# Altium PCB HV PDU.PcbDoc
Units mm, origin at the board's own origin, x right, y up, seen from the top; angles counter-clockwise.
Board outline 100 x 100 mm, 2 copper layers (Top Layer, Bottom Layer), stack 1.544 mm thick; 29 components, 17 nets, 64 pads, 0 vias.
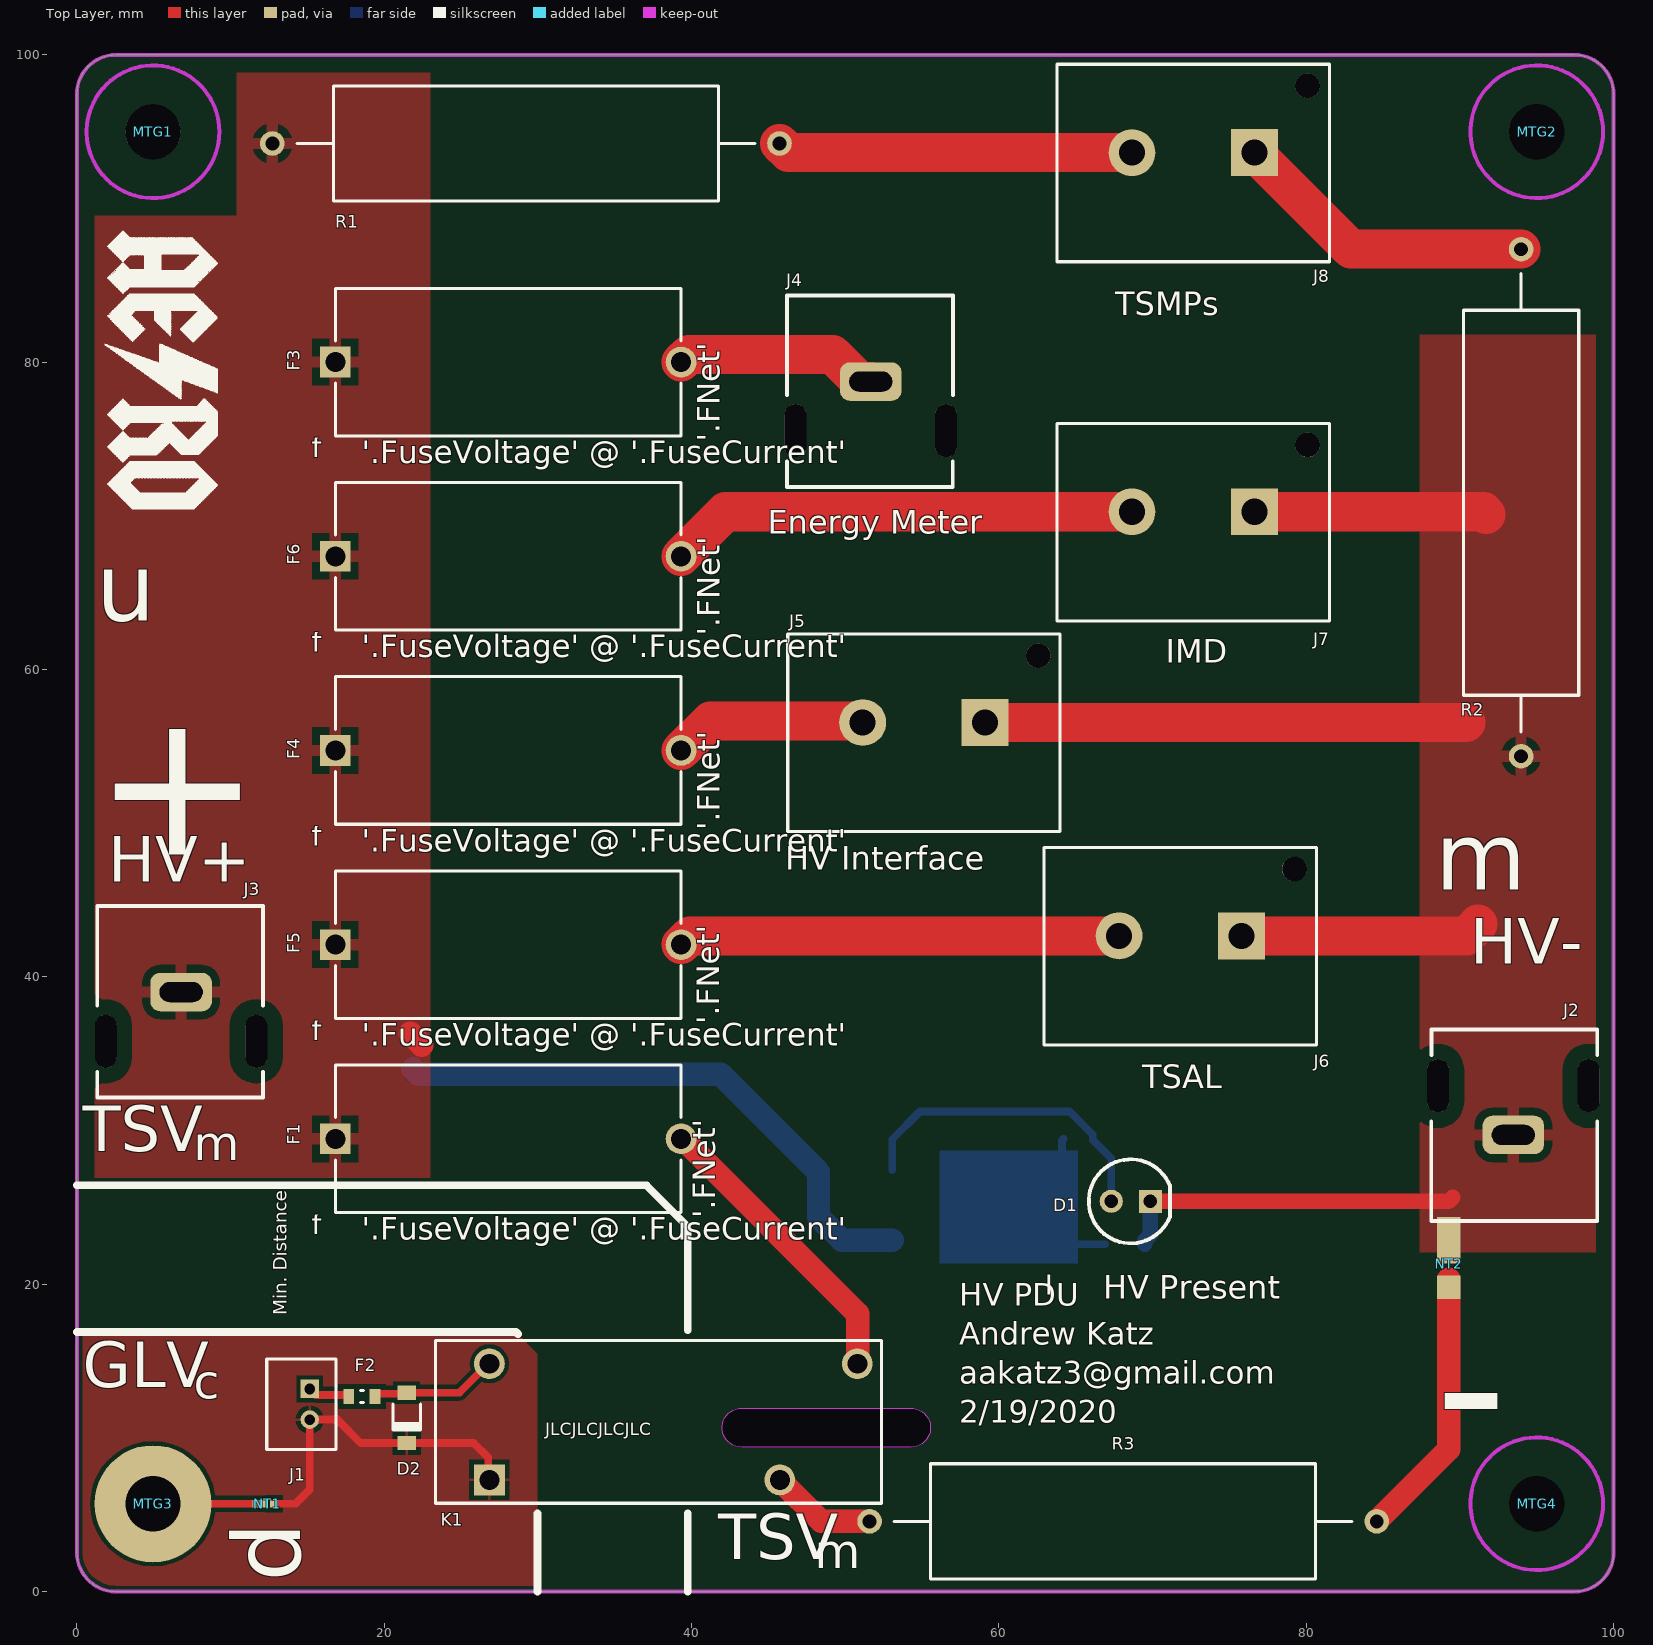
[diagram p0: Top Layer view]
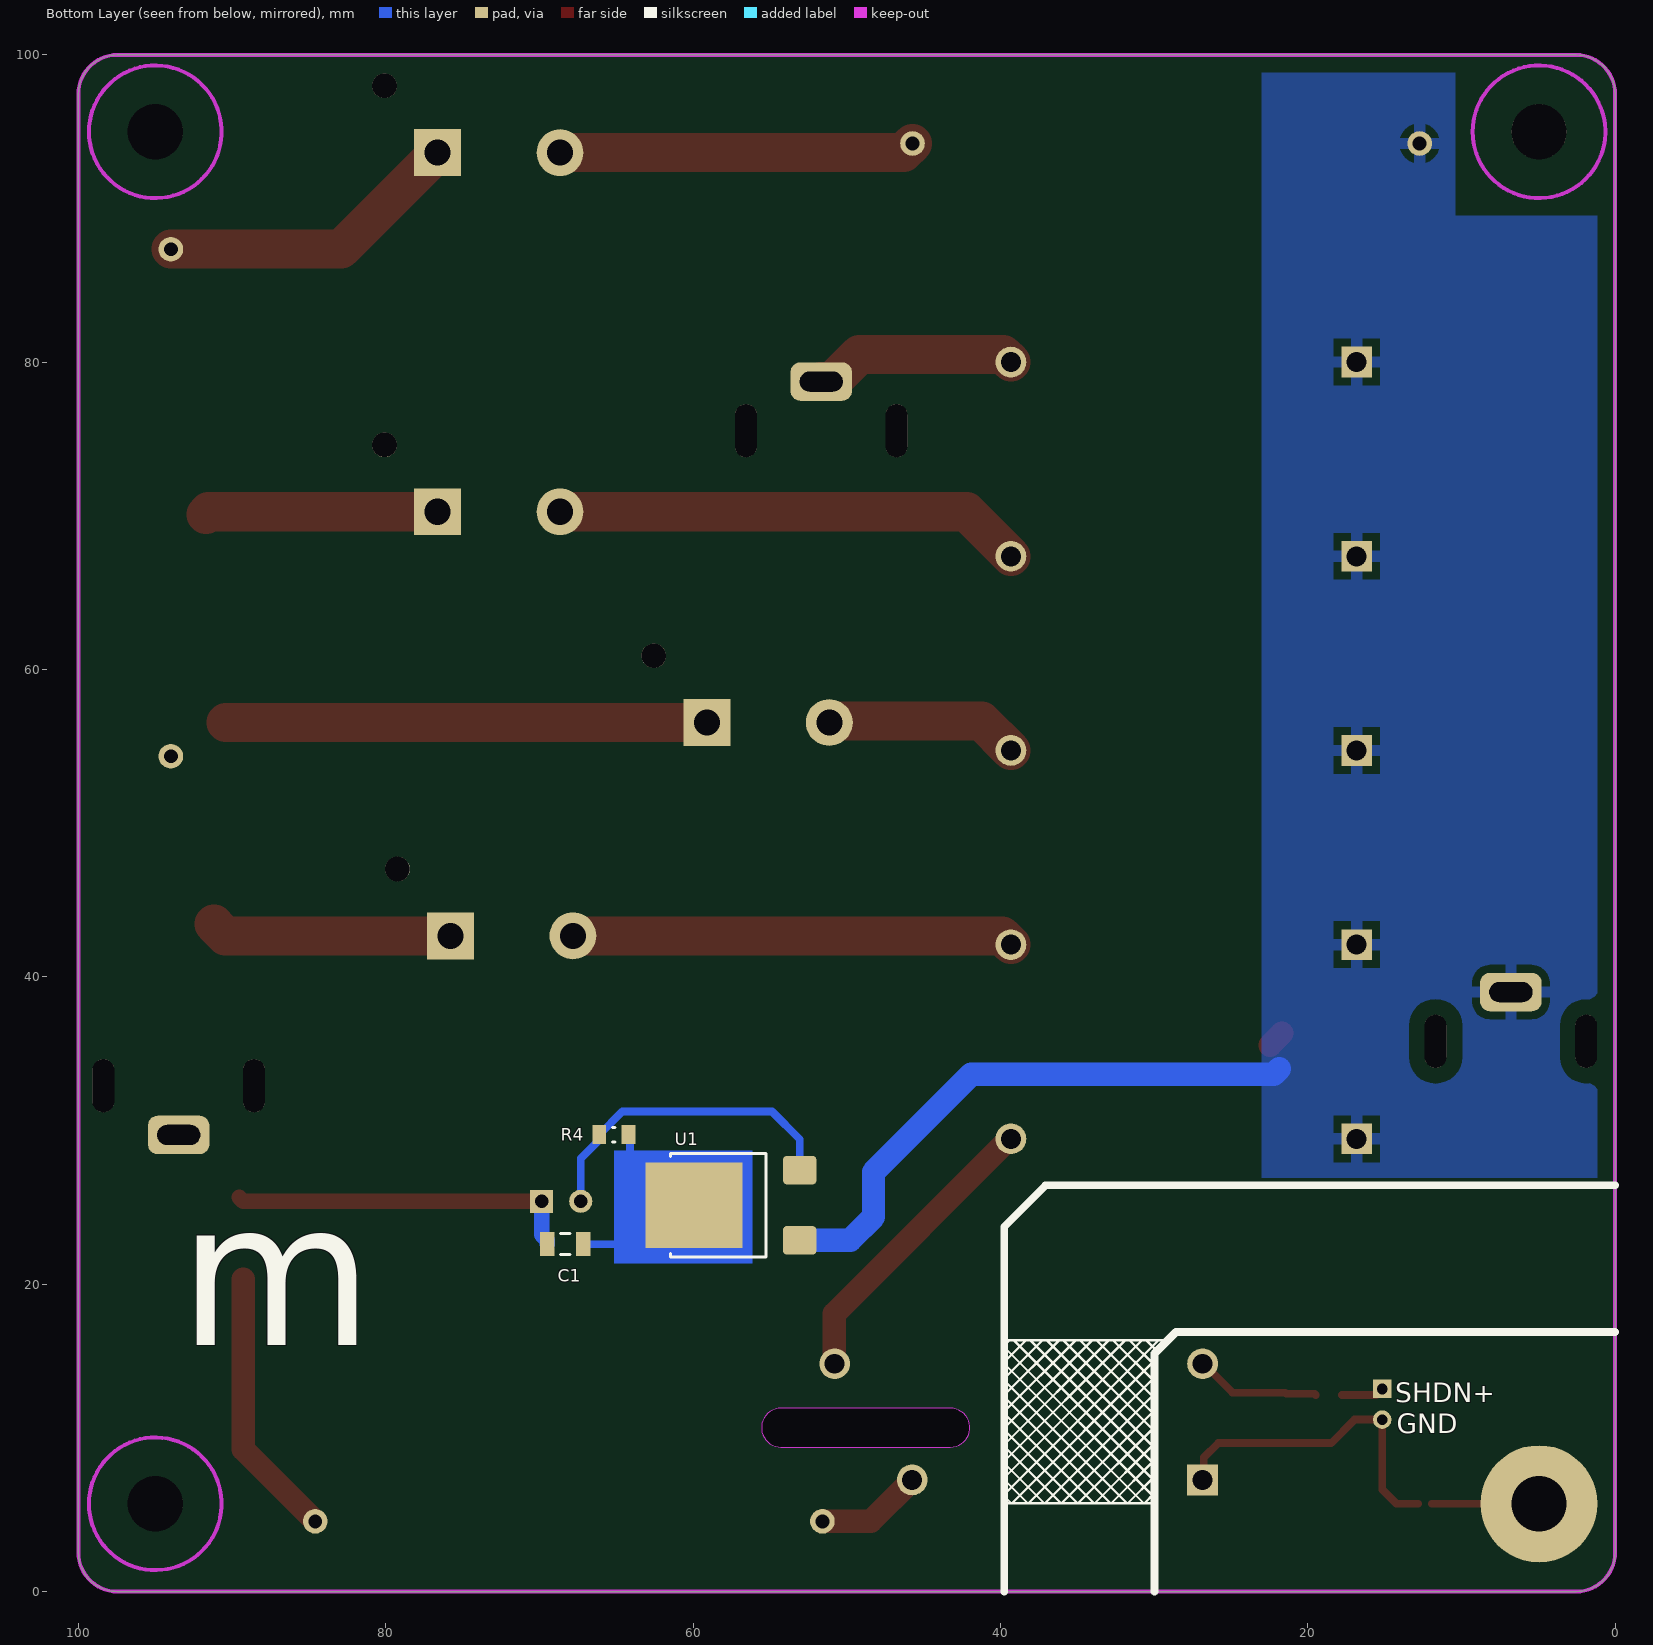
[diagram p1: Bottom Layer view, seen from below]
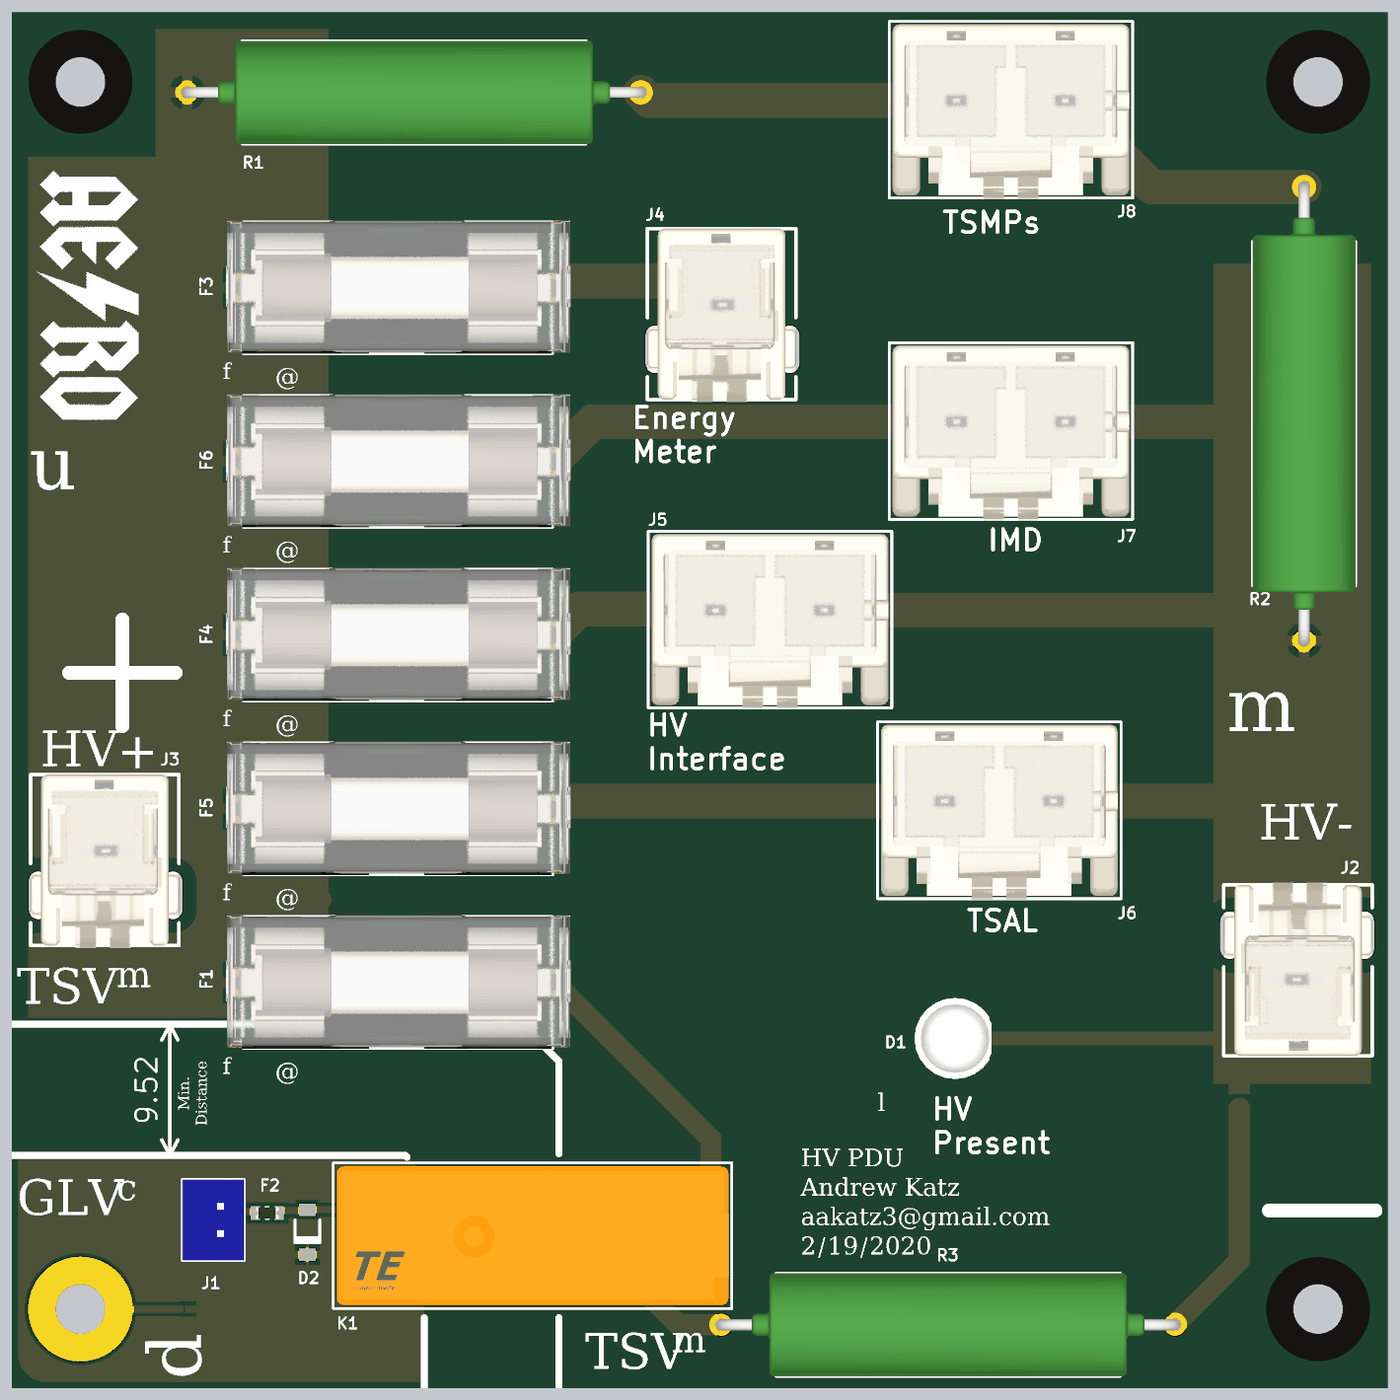
[diagram p2: 3D render of the assembled board from above, using the file's embedded part models]

## Layer stack, top to bottom
Top Solder: solder mask 0.0254, SM-001, Dk 4
Top Layer: signal copper 0.0356
Dielectric 1: core 1.4732, FR-4, Dk 4.2
Bottom Layer: signal copper 0.0356
Bottom Solder: solder mask 0.0254, SM-001, Dk 4

## Board outline
2.54,0 cw(c2.54,2.54) 0,2.54 0,97.46 cw(c2.54,97.46) 2.54,100 97.46,100 cw(c97.46,97.46) 100,97.46 100,2.54 cw(c97.46,2.54) 97.46,0
cut-out: 43.256,9.398 cw(c43.256,10.668) 43.256,11.938 54.28,11.938 cw(c54.28,10.668) 54.28,9.398

## Design rules (kind name [scope] priority, off if disabled: settings)
Clearance TsGlvClr [InNetClass('TS') vs InNetClass('GLV')] p1: gap=10 ignorepadtopadclearanceinfootprint=TRUE except(0: Arc-Hole Track-Hole SMDPad-Hole THPad-Hole Via-Hole Fill-Hole Poly-Hole Region-Hole Text-Hole; 500: Poly-Region)
Clearance MTG [InNetClass('MTG') vs InNetClass('TS')] p2: gap=10 ignorepadtopadclearanceinfootprint=TRUE except(0: Arc-Hole Track-Hole SMDPad-Hole THPad-Hole Via-Hole Fill-Hole Poly-Hole Region-Hole Text-Hole; 4.978: Arc-Arc Arc-Track Arc-SMDPad Arc-THPad Track-Track Track-SMDPad Track-THPad; 500: Poly-Region)
Clearance TsTsClr [InNetClass('TS+') vs InNetClass('TS-')] p3 off: gap=8.5 ignorepadtopadclearanceinfootprint=TRUE except(0: Arc-Hole Track-Hole SMDPad-Hole THPad-Hole Via-Hole Fill-Hole Poly-Hole Region-Hole Text-Hole)
Clearance TSOther [InNetClass('TS') vs Not IsNetTieComponent] p4: gap=1.016 ignorepadtopadclearanceinfootprint=FALSE except(0: Arc-Hole Track-Hole SMDPad-Hole THPad-Hole Via-Hole Fill-Hole Region-Hole Text-Hole; 0.508: Arc-Region Track-Region SMDPad-Region THPad-Region Via-Region Fill-Region Poly-Region Region-Region; 0.762: THPad-THPad)
Clearance [All] p5: gap=0.254 ignorepadtopadclearanceinfootprint=FALSE except(0: Arc-Hole Track-Hole SMDPad-Hole THPad-Hole Via-Hole Fill-Hole Poly-Hole Region-Hole Text-Hole)
Creepage MTGCr [InNetClass('MTG') vs InNetClass('TS')] p1: checkdistance=6.4
Creepage TsTsCr [InNetClass('TS+') vs InNetClass('TS-')] p2: checkdistance=2.1
Creepage TsGlvCr [InNetClass('TS') vs InNetClass('GLV')] p3: checkdistance=6.4
Height [All] p1: minheight=0 maxheight=2539.975 prefheight=12.7
HoleSize [All] p1: absolutevalues=TRUE maxlimit=6.35 minlimit=0.229 maxpercent=80.000 minpercent=20.000
PolygonConnect TSPoly [InPolygonClass('TS')] p1: thpad.connectstyle=Relief thpad.reliefconductorwidth=0.762 thpad.reliefentries=4 thpad.polygonreliefangle="90 Angle" thpad.airgapwidth=0.508 smdpad.connectstyle=Direct smdpad.reliefconductorwidth=1.016 smdpad.reliefentries=2 smdpad.polygonreliefangle="90 Angle" smdpad.airgapwidth=0.762 via.connectstyle=Direct via.reliefconductorwidth=0.254 via.reliefentries=4 via.polygonreliefangle="90 Angle" via.airgapwidth=0.254
PolygonConnect [All] p2: connectstyle=Relief reliefconductorwidth=0.203 reliefentries=4 polygonreliefangle="90 Angle" airgapwidth=0.305
RoutingVias [All] p1: holewidth=0.711 width=1.27 viastyle="Through Hole" minholewidth=0.711 minwidth=1.27 maxholewidth=0.711 maxwidth=1.27
SolderMaskExpansion tent [IsVia or IsNetTieComponent] p1: expansion=0.102 istentingtop=TRUE
SolderMaskExpansion [All] p2: expansion=0.076 istentingtop=FALSE
Width TSWidth [InNetClass('TS')] p1: maxlimit=3.048 minlimit=1.016 preferedwidth=1.524 minimp=50.000000 maximp=50.000000 favimp=50.000000
Width [All] p2: maxlimit=1.016 minlimit=0.254 preferedwidth=0.381 minimp=50.000000 maximp=50.000000 favimp=50.000000
28 further rules are at their usual default settings.

## Classes and differential pairs
net class MTG: SHLD
polygon class TS: HV+_L01_P002 HV+_L01_P009 HV-_L01_P008
component class TS-_COMP: R2
component class TS+_COMP: F1 F3 F4 F5 F6 R1
component class GLV: D2 F2 J1
net class TS: EM+ HV+ HV- HV_DIS_F HV_DIS_RLY HV_DIS_RLY- HVINT+ IMD+ TSAL+ TSMP+ TSMP-
net class TS-: HV- HV_DIS_RLY- TSMP-
net class TS+: EM+ HV+ HV_DIS_F HV_DIS_RLY HVINT+ IMD+ TSAL+ TSMP+
net class GLV: GND SHDN+ SHDN_FUSED SHLD

## Components (designator, comment, footprint, x,y, rotation, side; value= is the part's Value field where it differs from the comment)
C1 "C2012X7S2A105K125AB" CAPC2013X145X20ML20 68.314,22.619 r180 bottom
D1 "WP7113LSECK/J3" LED_5MM 69.85,25.4 r180 top
D2 "1N4148W-TP" MCC-SOD123_V 21.463,11.303 r270 top
F1 "0031.8201" Schurter_0031.8201_ASM 28.067,29.464 r0 top
F2 "MF-FSMF010X-2" MF-FSMF 18.542,12.7 r0 top
F3 "0031.8201" Schurter_0031.8201_ASM 28.067,80.01 r0 top
F4 "0031.8201" Schurter_0031.8201_ASM 28.067,54.737 r0 top
F5 "0031.8201" Schurter_0031.8201_ASM 28.067,42.1 r0 top
F6 "0031.8201" Schurter_0031.8201_ASM 28.067,67.373 r0 top
J1 "B2B-PH-K-S(LF)(SN)" JST_Sales_America_Inc._B2B-PH-K-S_LF_SN_0 14.605,12.192 r180 top
J2 "DF22-1P-7.92DSA(05)" DF22-1P-7.92DSA(05) 93.472,29.718 r180 top
J3 "DF22-1P-7.92DSA(05)" DF22-1P-7.92DSA(05) 6.784,39.014 r0 top
J4 "DF22-1P-7.92DSA(05)" DF22-1P-7.92DSA(05) 51.659,78.74 r0 top
J5 "DF22-2P-7.92DSA(05)" DF22-2P-7.92DSA_05_0 55.118,55.88 r0 top
J6 "DF22-2P-7.92DSA(05)" DF22-2P-7.92DSA_05_0 71.803,41.997 r0 top
J7 "DF22-2P-7.92DSA(05)" DF22-2P-7.92DSA_05_0 72.644,69.596 r0 top
J8 "DF22-2P-7.92DSA(05)" DF22-2P-7.92DSA_05_0 72.644,92.964 r0 top
K1 "1393225-5" RY553012 37.846,11.049 r0 top
MTG1 "PCB MTG M3 HV" MTG-M3-HV 4.953,94.996 r0 top
MTG2 "PCB MTG M3 HV" MTG-M3-HV 94.996,94.996 r0 top
MTG3 "PCB MTG M3" MTG-M3 4.953,5.715 r0 top
MTG4 "PCB MTG M3 HV" MTG-M3-HV 94.996,5.715 r0 top
NT1 "Net Tie" 20MIL_TIE 12.827,5.715 r180 top net-tie
NT2 "NET TIE" 60MIL_TIE 89.276,19.812 r90 top net-tie
R1 "AC07000001002JAC00" AC07 12.72,94.234 r0 top
R2 "AC07000001002JAC00" AC07 93.98,87.356 r270 top
R3 "AC07000001001JAC00" AC07 51.582,4.572 r0 top
R4 "KTR10EZPF6040" RESC2012X06N_HV 65.151,29.739 r0 bottom
U1 "LR8K4-G" Microchip_C04-189_MFG 57.537,25.146 r90 bottom

## Footprints (in the part's own frame and the unit in brackets; to place one, negate y for a bottom-side part, rotate by r counter-clockwise, add the part's x,y. Pads: shape width x height; smd on the part's side, far side on the other; paste and mask are expansions set on the pad)
20MIL_TIE [mil]
  rect 20x20 smd paste-100 mask-100: 1(0,0)
  rect 40x20 smd paste-100 mask-100: 2(35,0)
60MIL_TIE [mil]
  rect 60x60 smd paste-1000 mask+4: 1(0,0)
  rect 120x60 smd paste-1000 mask+4: 2(120,0)
AC07 [mm]
  round 1.6 hole 0.9: 1(0,0) 2(33,0)
  silkscreen extent 1.6,-3.75 31.4,3.75, body extent -0.4,-3.75 33.4,3.75, height 10.5
CAPC2013X145X20ML20 [mm]
  rect 0.95x1.55 smd: 1(-1.175,0) 2(1.175,0)
  silkscreen extent -0.3,-0.67 0.3,0.67, body extent -1.1,-0.72 1.1,0.72, height 1.45
DF22-1P-7.92DSA(05) [mm]
  rrect50% 4x2.5 hole 1.3 slot 2.8 at 0 deg: 1(0,0)
  oval 1.4x3.45 hole 1.4 slot 3.45 at 90 deg unplated: M1(-4.9,-3.2) M2(4.9,-3.2)
  silkscreen extent -5.46,-6.86 5.34,5.59, body extent -5.46,-7.04 5.34,5.59, height 23.67
DF22-2P-7.92DSA_05_0 [mm]
  rect 3.048x3.048 hole 1.7 paste-1000: 1(3.985,0.675)
  round 3.048 hole 1.7 paste-1000: 2(-3.985,0.675)
  round 1.6 hole 1.6 unplated paste-1000 mask+0: M1(7.435,5.025)
  silkscreen extent -8.86,-6.43 8.86,6.43, body extent -8.61,-6.51 8.61,6.22, height 23.64
JST_Sales_America_Inc._B2B-PH-K-S_LF_SN_0 [mm]
  rect 1.2x1.2 hole 0.7 paste-1000: 1(-0.55,-1)
  round 1.2 hole 0.7 paste-1000: 2(-0.55,1)
  silkscreen extent -2.25,-2.95 2.25,2.95, body extent -2.25,-2.95 2.25,2.95, height 6
LED_5MM [mm]
  round 1.5 hole 0.9: A(2.54,0)
  rect 1.5x1.5 hole 0.9: K(0,0)
  silkscreen extent -1.27,-2.73 4,2.73, body extent -1.23,-2.95 4.22,2.95, height 8.6
MCC-SOD123_V [mil] "SOD123, 2-Leads, Body 2.7x1.6mm, Height 1.35mm"
  rect 35.98x47.99 smd: 1(-64.5,0) 2(64.5,0)
  silkscreen extent -36,-35 31,35, body extent -53,-31 53,31, height 53
MF-FSMF [mm] "MF-FSMF Series - PTC Resettable Fuse"
  rect 0.7x1 smd: 1(-0.85,0) 2(0.85,0)
  Top Layer pour cut-out: -1.55,0.8 1.55,0.8 1.55,-0.8 -1.55,-0.8
  Bottom Layer pour cut-out: -1.55,0.8 1.55,0.8 1.55,-0.8 -1.55,-0.8
  silkscreen extent -0.1,-0.4 0.1,0.4, body extent -0.82,-0.42 0.83,0.43, height 0.48
Microchip_C04-189_MFG [mil]
  rrect25% 73x85 smd: 1(-90,-176.25) 3(90,-176.25)
  rect 219x248 smd: 4(0,94.75)
  silkscreen extent -132,-90 132,155, body extent -129,-195 129,195, height 99
MTG-M3 [mil]
  round 300 hole 142: 1(0,0)
MTG-M3-HV [mil]
  round 140 hole 142 unplated mask+79: 1(0,0)
  Keep-Out Layer circle w10: c0,0 r170
RESC2012X06N_HV [mm] "Chip Resistor, 2-Leads, Body 2.00x1.25mm, IPC Medium Density"
  rect 0.9x1.25 smd: 1(-0.95,0) 2(0.95,0)
  silkscreen extent -0.07,-0.48 0.09,0.48, body extent -1.05,-0.67 1.05,0.67, height 0.65
RY553012 [mm]
  round 2 hole 1.3 paste-1000: 11(7.9,-3.78) 12(12.94,3.78) A2(-11,3.78)
  rect 2x2 hole 1.3 paste-1000: A1(-11,-3.78)
  silkscreen extent -14.5,-5.3 14.5,5.3, body extent -14.25,-5.05 14.25,5.05, height 12.3
Schurter_0031.8201_ASM [mm]
  rect 2x2 hole 1.3 paste-1000: 1(-11.25,0)
  round 2 hole 1.3 paste-1000: 2(11.25,0)
  silkscreen extent -11.25,-4.8 11.25,4.8, body extent -12.54,-4.8 12.54,4.9, height 12.68

## Part data
C1: "Chip Capacitor, 1 uF, +/- 10%, 100 V, -55 to 125 degC, 0805 (2012 Metric), RoHS, Tape and Reel", Capacitance=1µF, Manufacturer=TDK, Operating Temperature=-55degC~125degC, Package / Case=0805(2012Metric), Package Description="2-Pin Surface Mount Device, Body 2 x 1.25 mm", Package Reference=805, PCN Part Number=MLCCPartNumberChange30/Nov/2012, Ratings=-, Standard Package=1, Supplier Part Number 1=445-5205-1-ND, Temperature Coefficient=X7S, Tolerance=±10%, Voltage - Rated=100V, Applications=GeneralPurpose, Catalog Drawings=CSERIES_2012-0805_1.45, Category=Capacitors, Datasheet URL=https://datasheet.ciiva.com/24216/c2012x7s2a105k125ab-265082-24216433.pdf, Datasheet Version=Sep-13, Family=CeramicCapacitors, Featured Product=Compact,High-CapacitanceMultilayerCeramicChipCapacitorsMidVoltageX7S-100VMLCCsC-SeriesMidVoltageMLCCs, Features=-, Height - Seated (Max)=-, Kits=445-9009-KIT-ND-KITCAPCERHICAP100V-630VSMDSAMPLEKIT1008-ND-KITCAPCERMLCC100V-630V, Lead Spacing=-, Lead Style=-, Manufacturer 1=TDK, Manufacturer Part Number 1=C2012X7S2A105K125AB, Manufacturer URL=http://www.tdk.com/, Mounting Type=SurfaceMount,MLCC, Online Catalog=CSeries,MidVoltage, Other Names=445-5205-1, Packaging=CutTape(CT), Product Training Modules=SEAT,CCV,andTVCLDesignToolsCSeriesMidVoltageCapacitorsFamilyGuidetoReplacinganElectrolyticCapacitorwithanMLCC, RoHS Information=RoHSCertificate-MLCC, Series=C, Size / Dimension="0.079\"Lx0.049\"W(2.00mmx1.25mm)", Supplier 1=Digi-Key, Supplier 2=Arrow, Supplier Part Number 2=C2012X7S2A105K, Thickness (Max)="0.053\"(1.35mm)"
D1: "Red 625nm LED Indication - Discrete 1.8V Radial", Case/Package=Radial, Color=Red, Forward Voltage=1.8V, Lens Color=Colorless, Manufacturer=Kingbright, Supplier Part Number 1=754-1916-ND, Test Current=2mA, Category=LEDs, Dominant Wavelength=625nm, Height=8.6mm, Lead Free="Lead Free", Lens Transparency=Clear, Luminous Intensity=550mcd, Manufacturer Part Number=WP7113LSECK/J3, Mount="Through Hole", Packaging=Bulk, Supplier 1=Digi-Key, Viewing Angle=20°
D2: library part CMP-2000-04993-1, "High Speed Switching Diode, 400 mW, 150 mA, -65 to 150 degC, 2-Pin SOD123, RoHS, Tape and Reel", Average Forward Current-Max=0.15A, Manufacturer="Micro Commercial Components", Package Description="2-Pin Small Outline Diode, Body 2.7 x 1.6 mm, Height 1.35 mm", Package Reference=SOD123, Peak Current-Max=2A, Power Dissipation=400mW, Reverse Voltage-Max [Vrrm]=100V, ClassName=GLV, Datasheet URL=https://datasheet.ciiva.com/16836/1n4148wsod123-16836277.pdf, Datasheet Version="Rev. C, 07/2014", Manufacturer URL=http://www.mccsemi.com/, Package URL=http://www.mccsemi.com/up_pdf/1N4448W(SOD-123).pdf, Reverse Recovery Time-Max=4ns
F1: "Fuse Block 10A 500V 1 Circuit Cartridge Through Hole", Color=Black, Flammability Rating="UL94 V-0", FuseCurrent=0.5A, FuseVoltage=500VDC, Insulation Resistance=10MR, Manufacturer=Schurter, Manufacturer Part Number=00318201, Max Operating Temperature=85°C, Min Operating Temperature=-40°C, Package Quantity=100, Approvals=UL,CSA,IEC,EN, Body Material=Thermoplastic, Category=Fuses, ClassName=TS+_COMP, Contact Material="Copper Alloy,Tin", Contact Plating=Tin, Cover P/N=0853.0551, Depth=10.8mm, FNet=HV_DIS_F, Fuse P/N=0ADKC0500-BE, Lead Free="Lead Free", Length=25mm, Material=Thermoplastic,Tin, Mount="PCB,Through Hole", Number of Circuits=1, Number of Poles=1, Orientation=Horizontal, Packaging=Bulk, Radiation Hardening=No, REACH SVHC="No SVHC", Termination="PC Pin", Weight=0.059966oz
F2: "Polymeric PTC Resettable Fuse 15V 100mA Ih Surface Mount 0603 (1608 Metric), Concave", Supplier Part Number 1=MF-FSMF010X-2CT-ND, ClassName=GLV, Supplier 1=Digi-Key
F3 F5 F6: "Fuse Block 10A 500V 1 Circuit Cartridge Through Hole", Color=Black, Current Rating=10A, Flammability Rating="UL94 V-0", FuseCurrent=0.5A, FuseVoltage=500VDC, Insulation Resistance=10MR, Manufacturer=Schurter, Manufacturer Part Number=00318201, Max Operating Temperature=85°C, Min Operating Temperature=-40°C, Package Quantity=100, Voltage=500V, Voltage Rating=250V, Approvals=UL,CSA,IEC,EN, Body Material=Thermoplastic, Category=Fuses, ClassName=TS+_COMP, Contact Material="Copper Alloy,Tin", Contact Plating=Tin, Cover P/N=0853.0551, Depth=10.8mm, Fuse Current=10A, Fuse P/N=0ADKC0500-BE, Illumination Type=Illuminated, Lead Free="Lead Free", Length=25mm, Material=Thermoplastic,Tin, Mount="PCB,Through Hole", Number of Circuits=1, Number of Poles=1, Orientation=Horizontal, Packaging=Bulk, Radiation Hardening=No, REACH SVHC="No SVHC", Termination="PC Pin", Voltage Rating (AC)=500V, Voltage Rating (DC)=500V, Weight=0.059966oz
  F3: FNet=EM+
  F5: FNet=TSAL+
  F6: FNet=IMD+
F4: "Fuse Block 10A 500V 1 Circuit Cartridge Through Hole", Color=Black, Current Rating=10A, Flammability Rating="UL94 V-0", FuseCurrent=2.5A, FuseVoltage=500VDC, Insulation Resistance=10MR, Manufacturer=Schurter, Manufacturer Part Number=00318201, Max Operating Temperature=85°C, Min Operating Temperature=-40°C, Package Quantity=100, Voltage=500V, Voltage Rating=250V, Approvals=UL,CSA,IEC,EN, Body Material=Thermoplastic, Category=Fuses, ClassName=TS+_COMP, Contact Material="Copper Alloy,Tin", Contact Plating=Tin, Cover P/N=0853.0551, Depth=10.8mm, FNet=HVINT+, Fuse Current=10A, Fuse P/N=0ADKC2500-BE, Illumination Type=Illuminated, Lead Free="Lead Free", Length=25mm, Material=Thermoplastic,Tin, Mount="PCB,Through Hole", Number of Circuits=1, Number of Poles=1, Orientation=Horizontal, Packaging=Bulk, Radiation Hardening=No, REACH SVHC="No SVHC", Termination="PC Pin", Voltage Rating (AC)=500V, Voltage Rating (DC)=500V, Weight=0.059966oz
J1: "Connector Header Through Hole 2 position 0.079\" (2.00mm)", Color=Natural, Contact Resistance=20mR, Current Rating=2A, Housing Color=White, Insulation Resistance=1MR, Manufacturer=JST, Manufacturer Part Number=B2BPHKSLFSN, Max Operating Temperature=85°C, Max Voltage Rating (AC)=100V, Min Operating Temperature=-25°C, Supplier Part Number 1=37K9940, Category=Connectors, ClassName=GLV, Connector Type="Male Pin", Contact Material=Brass,Tin, Contact Mating Length=0.13inch, Contact Plating=Tin,Copper, Depth=4.5mm, Fastening Type=Detent, Gender=Male, Height=9.4mm, Housing Material=Polyamide, Lead Free="Lead Free", Lead Pitch=2mm, Length=5.9mm, Max Current Rating=2A, Max Voltage Rating (DC)=100V, Mount="Through Hole", Number of Contacts=2, Number of Pins=2, Number of Poles=2, Number of Positions=2, Number of Rows=1, Orientation=Straight, Packaging=Bulk, Pitch=2mm, REACH SVHC="No SVHC", Supplier 1=Newark, Supplier 2=Digi-Key, Supplier Part Number 2=455-1704-ND, Termination=Solder, Voltage Rating=100V, Voltage Rating (AC)=100V, Width=4.5mm, Working Voltage=100V
J2 J3 J4: "Connector Header Through Hole 1 position", Color=Beige, Manufacturer=Hirose, Package Quantity=100, Category=Connectors, Connector Type="Male Pin", Contact Material="Copper Alloy", Contact Mating Length=0.354inch, Contact Plating=Tin, Fastening Type=Latch, Gender=Male, Lead Free="Lead Free", Manufacturer Part Number=DF22-1P-7.92DSA(05), Mount="Through Hole", Number of Contacts=1, Number of Positions=1, Number of Rows=1, Packaging=Bulk, REACH SVHC=Unknown, Termination=Solder
J5 J6 J7 J8: "Connector Header Through Hole 2 position 0.312\" (7.92mm)", Color=Beige, Contact Resistance=5mR, Current Rating=25A, Housing Color=Natural, Manufacturer=Hirose, Max Operating Temperature=85°C, Max Voltage Rating (AC)=1kV, Min Operating Temperature=-35°C, Package Quantity=100, Supplier Part Number 1=H10714-ND, Voltage Rating=600V, Category="Headers and Wire Housings", Connector Type="Male Pin", Contact Material="Copper Alloy", Contact Mating Length=0.354inch, Contact Plating=Copper,Tin,Lead, Depth=12.45mm, Gender=Male, Housing Material=Polyamide, Lead Free="Lead Free", Length=17.22mm, Manufacturer Part Number=DF22-2P-7.92DSA(05), Mount="Through Hole", Number of Contacts=2, Number of Positions=2, Number of Rows=1, Orientation=Straight, Packaging=Bulk, Pitch=7.92mm, Radiation Hardening=No, REACH SVHC=Unknown, Supplier 1=Digi-Key, Termination=Solder
K1: "General Purpose Relay SPST-NC (1 Form B) 12VDC Coil Through Hole", Coil Current=19.2mA, Coil Power=300mW, Coil Resistance=627R, Coil Voltage (DC)=12V, Contact Current Rating=8A, Contact Voltage Rating (AC)=250V, Dropout Voltage=1.2V, Manufacturer="TE Connectivity", Max Operating Temperature=70°C, Min Operating Temperature=-40°C, Package Quantity=20, Power Consumption=230mW, Supplier Part Number 1=PB2762-ND, Voltage Rating (AC)=400V, Category="Power Relays", Coil Type=Non-Latching, Contact Material=Tin,Silver, Depth=10.1mm, ELV=Compliant, Height=0.484inch, Lead Free="Lead Free", Length=1.122inch, Manufacturer Part Number=1393225-5, Mount="Through Hole", Number of Pins=4, Operate Time=9ms, Packaging=Rail/Tube, Relay Type="General Purpose", Release Time=5ms, Supplier 1=Digi-Key, Termination=PCB, Throw Configuration=SPST, Weight=0.282oz, Width=10.1mm
MTG1 MTG2 MTG4: library part "MTG M3 HV", "PCB Mounting for M3 Screw - HV", PCB Package=M3, P/N="MTG M3 HV"
MTG3: library part "MTG M3", "PCB Mounting for M3 Screw", PCB Package=M3, P/N="MTG M3"
NT1: library part "NET TIE", "Net Tie (No BOM)"
NT2: "Net Tie (No BOM)"
R1 R2: "10 kOhms ±5% 7W Through Hole Resistor Axial Flame Retardant Coating, Pulse Withstanding, Safety Wirewound", Case/Package=Axial, Manufacturer="Vishay BCcomponents", Max Operating Temperature=200°C, Max Power Dissipation=7W, Min Operating Temperature=-40°C, Package Quantity=500, Resistance=10kR, Supplier Part Number 1=PPC7W10.0KCT-ND, Temperature Coefficient=180ppm/°C, Tolerance=5%, Voltage Rating=265V, Category="Through-Hole Resistors", Composition=Wirewound, Contact Plating=Tin, Diameter=7.5mm, Features="Flame Retardant Coating", Length=26mm, Manufacturer Part Number=AC07000001002JAC00, Military Standard=Not, Number of Terminations=2, Packaging="Tape and Reel", Power Rating=7W, REACH SVHC=Unknown, Supplier 1=Digi-Key, Termination=Axial, Voltage Rating (DC)=265V, Width=7.49mm
  R1: ClassName=TS+_COMP
  R2: ClassName=TS-_COMP
R3: "1 kOhms ±5% 7W Through Hole Resistor Axial Flame Retardant Coating, Pulse Withstanding, Safety Wirewound", Case/Package=Axial, Manufacturer="Vishay BCcomponents", Max Operating Temperature=200°C, Max Power Dissipation=7W, Min Operating Temperature=-40°C, Package Quantity=1, Resistance=1kR, Supplier Part Number 1=PPC7W1.0KCT-ND, Temperature Coefficient=-80ppm/°C, Tolerance=5%, Voltage Rating=84V, Category="Through-Hole Resistors", Composition=Wirewound, Contact Plating=Tin, Diameter=7.5mm, Features="Flame Retardant Coating", Lead Free="Lead Free", Length=26mm, Manufacturer Part Number=AC07000001001JAC00, Military Standard=Not, Number of Pins=2, Number of Terminations=2, Packaging="Tape and Reel", Power Rating=7W, Radiation Hardening=No, Supplier 1=Digi-Key, Termination=Axial, Voltage Rating (DC)=84V, Width=7.49mm
R4: "604 Ohms ±1% 0.125W, 1/8W Chip Resistor 0805 (2012 Metric) Automotive AEC-Q200, High Voltage Thick Film", Case Code (Imperial)=0805, Case Code (Metric)=2012, High Voltage="High Voltage", Manufacturer=Rohm, Max Operating Temperature=155°C, Max Power Dissipation=125mW, Min Operating Temperature=-55°C, Package Quantity=5000, Resistance=604R, Supplier Part Number 1=RHM604AHCT-ND, Temperature Coefficient=100ppm/°C, Tolerance=1%, Case/Package=0805, Category="Chip SMD Resistors", Composition="Thick Film", Features="Automotive AEC-Q200", Height=0.026inch, Length=0.079inch, Manufacturer Part Number=KTR10EZPF6040, Number of Terminations=2, Packaging="Tape and Reel", Supplier 1=Digi-Key, Width=0.049inch
U1: "Linear Voltage Regulator IC Positive Adjustable 1 Output  10mA TO-252, (D-Pak)", Supplier Part Number 1=LR8K4-GCT-ND, Supplier 1=Digi-Key

## Nets (pads, with @x,y where several pads share a name; then routed paths per layer and width w, separated by ;. In a path a pad name is that pad's centre, name@x,y a point inside that pad or via, vN(x,y) a via of type N, cw(c..) or ccw(c..) an arc to the next point about the centre after c; other vN are vias at no path point)
ADJ: D1.A R4.2 U1.3 | length 21.3
  Bottom Layer w0.508: U1.3 53.061,29.439 54.864,31.242 64.598,31.242 R4.2 66.101,29.464 66.101,29.389 67.31,28.18 D1.A
EM+: F3.2 J4.1 | length 13.3
  Top Layer w2.54: F3.2 39.825,80.518 49.171,80.518 50.949,78.74 J4.1
GND: D2.2 J1.2 K1.A1 NT1.1 | length 21.4
  Top Layer w0.508: NT1.1 14.224,5.715 15.155,6.646 J1.2 16.955,11.192 18.482,9.665 D2.2 25.831,9.665 26.763,8.733 26.763,7.352 K1.A1
HV+: F1.1 F3.1 F4.1 F5.1 F6.1 J3.1 R1.1 U1.1 | length 38.6
  Top Layer w1.524: 21.692,36.322 22.454,35.56
  Bottom Layer w1.524: 21.844,34.036 22.225,33.655 41.91,33.655 48.26,27.305 48.26,24.384 49.784,22.86 U1.1
HV-: C1.1 D1.K J2.1 J5.1 J6.1 J7.1 NT2.2 R2.2 | length 84.9
  Top Layer w1.016: D1.K 89.276,25.4 89.53,25.654
  Top Layer w2.54: J5.1@59.101,56.555 90.403,56.555 ; J6.1 90.424,42.672 91.186,43.434 ; J7.1 91.527,70.271 91.694,70.104
  Bottom Layer w1.016: C1.1 69.489,22.853 69.85,23.214 D1.K
HV_DIS_F: F1.2 K1.12 | length 19.3
  Top Layer w1.524: F1.2@39.419,29.464 50.813,18.069 K1.12@50.813,14.926
HV_DIS_RLY: K1.11 R3.1 | length 7
  Top Layer w1.524: K1.11 48.443,4.572 R3.1
HV_DIS_RLY-: NT2.1 R3.2 | length 17.7
  Top Layer w1.524: R3.2 89.276,9.266 NT2.1@89.276,20.32
HV_IND: C1.2 R4.1 U1.4 | length 10.9
  Bottom Layer w0.508: U1.4 62.471,22.619 64.088,22.619 64.101,22.606 C1.2@66.897,22.606 ; R4.1@64.201,29.464 64.101,29.364 64.101,26.831 64.262,26.67
HVINT+: F4.2 J5.2 | length 12.6
  Top Layer w2.54: F4.2 41.222,56.642 51.046,56.642 J5.2
IMD+: F6.2 J7.2 | length 30.5
  Top Layer w2.54: F6.2 42.215,70.271 J7.2
SHDN+: F2.1 J1.1 | length 2.8
  Top Layer w0.508: J1.1 15.544,12.803 F2.1@17.78,12.803
SHDN_FUSED: D2.1 F2.2 K1.A2 | length 8.3
  Top Layer w0.508: F2.2@19.48,12.803 19.549,12.872 21.394,12.872 D2.1 24.888,12.941 K1.A2@26.873,14.926
SHLD: MTG3.1 NT1.2 | length 7
  Top Layer w0.508: MTG3.1 NT1.2
TSAL+: F5.2 J6.2 | length 28.7
  Top Layer w2.54: F5.2 39.889,42.672 J6.2
TSMP+: J8.2 R1.2 | length 23.2
  Top Layer w2.54: R1.2 46.315,93.639 J8.2
TSMP-: J8.1 R2.1 | length 20
  Top Layer w2.54: J8.1 82.912,87.356 R2.1
pads on no net: J2.M1 J2.M2 J3.M1 J3.M2 J4.M1 J4.M2 J5.M1 J6.M1 J7.M1 J8.M1 MTG1.1 MTG2.1 MTG4.1

## Polygon pours and split planes (outlines as drawn)
GND on Top Layer "TOP_GND" (solid, pour order 10): 0,16.891 0,2.54 ccw(c2.54,2.54) 2.54,0 29.972,0 29.972,15.494 28.575,16.891 0,16.891
HV- on Top Layer "HV-_L01_P008" (solid, remove dead copper, pour order 8): 99.06,81.788 87.376,81.788 87.376,47.396 87.376,22.098 99.165,22.098
HV+ on Top Layer "HV+_L01_P009" (solid, remove dead copper, pour order 9): 1.092,26.924 1.092,89.535 10.414,89.535 10.414,99.06 22.987,99.06 22.987,26.924
no net on Bottom Overlay "NONET_L-01_P-001" (hatched 45Degree grid 0.762 track 0.152): 29.117,16.349 29.972,15.494 29.972,5.749 39.751,5.749 39.751,16.349
HV+ on Bottom Layer "HV+_L01_P002" (solid, remove dead copper, pour order 0): 1.092,26.924 1.092,89.535 10.414,89.535 10.414,98.847 22.987,98.847 22.987,26.924

## Keep-outs
Keep-Out Layer:
  the board outline again, w0.254

## Other copper
Bottom Layer:
  rectangle net HV_IND: 56.134,21.336 65.151,28.702

## Silkscreen, mask and mechanical layers (free items; w line width, h text height)
Top Overlay:
  drawing of 13 lines, arcs and shapes, not listed
  text "TSMPs" at 67.564,83.058 h1.52
  text "Energy Meter" at 44.958,68.834 h1.52
  text "u" at 1.27,61.722 h7.62
  text "IMD" at 70.866,60.452 h1.52
  text "+" at 1.092,47.935 h10.16
  text "HV Interface" at 46.083,46.99 h1.52
  text "HV+" at 2.034,45.212 h5.08
  text "m" at 88.392,44.196 h7.62
  text "HV-" at 90.68,39.878 h5.08
  text "TSAL" at 69.342,32.766 h1.52
  text "TSV" at 0.381,27.686 h5.08
  text "m" at 7.62,27.321 h3.81
  text "HV Present" at 66.802,19.05 h1.52
  text "l" at 62.992,18.873 h2.54
  text "Min. Distance" at 13.958,17.97 h1.52 r90
  text "GLV" at 0.381,12.319 h5.08
  text "c" at 7.62,11.811 h3.81
  text "HV PDU / Andrew Katz / aakatz3@gmail.com / 2/19/2020" at 57.404,10.501 h2.54
  text "JLCJLCJLCJLC" at 30.48,10.16 h0.8
  text "-" at 88.392,8.819 h10.16
  text "TSV" at 41.722,1.124 h5.08
  text "m" at 48.006,0.762 h3.81
  text "d" at 16.002,0.635 h7.62 r90
Bottom Overlay:
  lines w0.508: 0,16.891 27.305,16.891 28.575,16.891 29.972,15.494 29.972,0 ; 0,26.441 37.059,26.441 39.751,23.749 39.751,0
  text "SHDN+" at 14.301,12.338 h1.27
  text "m" at 93.472,11.176 h25.4
  text "GND" at 14.224,10.293 h1.27
Drill Drawing:
  drawing of 467 lines, arcs and shapes, not listed
  text "Symbol" at -9.335,168.629 h1.83
  text "Count" at 3.515,168.629 h1.83
  text "Hole Size" at 17.227,168.629 h1.83
  text "Plated" at 46.429,168.629 h1.83
  text "Hole Type" at 59.278,168.629 h1.83
  text "Drill Layer Pair" at 77.916,168.629 h1.83
  text "Via/Pad" at 116.005,168.629 h1.83
  text "Pad Shape" at 130.987,168.629 h1.83
  text "Template" at 158.665,168.629 h1.83
  text "1" at 3.515,164.819 h1.52
  text "142.00mil (3.607mm)" at 17.227,164.819 h1.52
  text "PTH" at 46.429,164.819 h1.52
  text "Round" at 59.278,164.819 h1.52
  text "Top Layer - Bottom Layer" at 77.916,164.819 h1.52
  text "Pad" at 116.005,164.819 h1.52
  text "Rounded" at 130.987,164.819 h1.52
  text "c762h361" at 158.665,164.819 h1.52
  text "2" at 3.515,161.009 h1.52
  text "27.56mil (0.700mm)" at 17.227,161.009 h1.52
  text "PTH" at 46.429,161.009 h1.52
  text "Round" at 59.278,161.009 h1.52
  text "Top Layer - Bottom Layer" at 77.916,161.009 h1.52
  text "Pad" at 116.005,161.009 h1.52
  text "(Mixed)" at 130.987,161.009 h1.52
  text "(Mixed)" at 158.665,161.009 h1.52
  text "3" at 3.515,157.199 h1.52
  text "51.18mil (1.300mm)" at 17.227,157.199 h1.52
  text "PTH" at 46.429,157.199 h1.52
  text "Slot" at 59.278,157.199 h1.52
  text "Top Layer - Bottom Layer" at 77.916,157.199 h1.52
  text "Pad" at 116.005,157.199 h1.52
  text "Rounded Rectangle" at 130.987,157.199 h1.52
  text "r400_250h130_280r50" at 158.665,157.199 h1.52
  text "3" at 3.515,153.389 h1.52
  text "142.00mil (3.607mm)" at 17.227,153.389 h1.52
  text "NPTH" at 46.429,153.389 h1.52
  text "Round" at 59.278,153.389 h1.52
  text "Top Layer - Bottom Layer" at 77.916,153.389 h1.52
  text "Pad" at 116.005,153.389 h1.52
  text "Rounded" at 130.987,153.389 h1.52
  text "c356hn361m561" at 158.665,153.389 h1.52
  text "4" at 3.515,149.579 h1.52
  text "62.99mil (1.600mm)" at 17.227,149.579 h1.52
  text "NPTH" at 46.429,149.579 h1.52
  text "Round" at 59.278,149.579 h1.52
  text "Top Layer - Bottom Layer" at 77.916,149.579 h1.52
  text "Pad" at 116.005,149.579 h1.52
  text "Rounded" at 130.987,149.579 h1.52
  text "c160hn160m160p100160" at 158.665,149.579 h1.52
  text "6" at 3.515,145.769 h1.52
  text "55.12mil (1.400mm)" at 17.227,145.769 h1.52
  text "NPTH" at 46.429,145.769 h1.52
  text "Slot" at 59.278,145.769 h1.52
  text "Top Layer - Bottom Layer" at 77.916,145.769 h1.52
  text "Pad" at 116.005,145.769 h1.52
  text "Rounded" at 130.987,145.769 h1.52
  text "r345_140hn140_345r100" at 158.665,145.769 h1.52
  text "8" at 3.515,141.959 h1.52
  text "35.43mil (0.900mm)" at 17.227,141.959 h1.52
  text "PTH" at 46.429,141.959 h1.52
  text "Round" at 59.278,141.959 h1.52
  text "Top Layer - Bottom Layer" at 77.916,141.959 h1.52
  text "Pad" at 116.005,141.959 h1.52
  text "(Mixed)" at 130.987,141.959 h1.52
  text "(Mixed)" at 158.665,141.959 h1.52
  text "8" at 3.515,138.149 h1.52
  text "66.93mil (1.700mm)" at 17.227,138.149 h1.52
  text "PTH" at 46.429,138.149 h1.52
  text "Round" at 59.278,138.149 h1.52
  text "Top Layer - Bottom Layer" at 77.916,138.149 h1.52
  text "Pad" at 116.005,138.149 h1.52
  text "(Mixed)" at 130.987,138.149 h1.52
  text "(Mixed)" at 158.665,138.149 h1.52
  text "14" at 3.515,134.339 h1.52
  text "51.18mil (1.300mm)" at 17.227,134.339 h1.52
  text "PTH" at 46.429,134.339 h1.52
  text "Round" at 59.278,134.339 h1.52
  text "Top Layer - Bottom Layer" at 77.916,134.339 h1.52
  text "Pad" at 116.005,134.339 h1.52
  text "(Mixed)" at 130.987,134.339 h1.52
  text "(Mixed)" at 158.665,134.339 h1.52
  text "Layer" at 142.776,131.798 h1.52
  text "Name" at 153.188,131.798 h1.52
  text "Material" at 176.803,131.798 h1.52
  text "Thickness" at 191.024,131.798 h1.52
  text "Constant" at 207.529,131.798 h1.52
  text "Board Layer Stack" at 222.004,131.798 h1.52
  text "49 Total" at 3.515,130.529 h1.52
  text "Top Overlay" at 153.188,128.75 h1.52
  text "Slot definitions :" at -9.335,126.847 h1.52
  text "Routed Path Length" at 16.896,126.847 h1.52
  text "= Calculated from tool start centre position to tool end centre position." at 44.904,126.847 h1.52
  text "Top Solder" at 153.188,125.702 h1.52
  text "SM-001" at 176.803,125.702 h1.52
  text "1.00mil" at 191.024,125.702 h1.52
  text "4" at 207.529,125.702 h1.52
  text "Hole Length" at 16.896,124.307 h1.52
  text "= Routed Path Length + Tool Size = Slot length as defined in the PCB layout" at 34.493,124.307 h1.52
  text "1" at 142.776,122.654 h1.52
  text "Top Layer" at 153.188,122.654 h1.52
  text "Copper" at 176.803,122.654 h1.52
  text "1.40mil" at 191.024,122.654 h1.52
  text "Dielectric 1" at 153.188,119.606 h1.52
  text "FR-4" at 176.803,119.606 h1.52
  text "58.00mil" at 191.024,119.606 h1.52
  text "4.2" at 207.529,119.606 h1.52
  text "2" at 142.776,116.558 h1.52
  text "Bottom Layer" at 153.188,116.558 h1.52
  text "Copper" at 176.803,116.558 h1.52
  text "1.40mil" at 191.024,116.558 h1.52
  text "Bottom Solder" at 153.188,113.51 h1.52
  text "SM-001" at 176.803,113.51 h1.52
  text "1.00mil" at 191.024,113.51 h1.52
  text "4" at 207.529,113.51 h1.52
  text "Bottom Overlay" at 153.188,110.462 h1.52
Board:
  lines w0.127: 0,2.54 ccw(c2.54,2.54) 2.54,0 97.46,0 ccw(c97.46,2.54) 100,2.54 100,97.46 ccw(c97.46,97.46) 97.46,100 2.54,100 ccw(c2.54,97.46) 0,97.46 0,2.54 ; 43.256,9.398 cw(c43.256,10.668) 43.256,11.938 54.28,11.938 cw(c54.28,10.668) 54.28,9.398 43.256,9.398
Sheet (Mech100):
  drawing of 46 lines, arcs and shapes, not listed
  text "1" at 11.938,174.123 h1.23
  text "2" at 81.602,174.123 h1.23
  text "3" at 151.543,174.123 h1.23
  text "4" at 221.271,174.123 h1.23
  text "A" at -20.393,149.677 h1.23
  text "A" at 253.919,149.677 h1.23
  text "B" at -20.265,95.697 h1.23
  text "B" at 254.025,95.697 h1.23
  text "C" at -20.287,41.716 h1.23
  text "C" at 254.004,41.716 h1.23
  text "D" at -20.35,-12.264 h1.23
  text "D" at 253.94,-12.264 h1.23
  text "Title:" at 141.706,-16.865 h1.67
  text "'.Pcb_File_Name_No_Path'" at 150.589,-16.865 h1.61
  text "PDU for the HV Box" at 148.066,-19.611 h0.83
  text "For CS4.5" at 148.066,-21.137 h0.83
  text "Desc:" at 141.706,-21.593 h1.06
  text "Designed to supply low current HV to boards that need it" at 148.066,-22.388 h0.83
  text "Letter" at 146.794,-26.554 h1.06
  text "Auth:" at 156.949,-26.554 h1.06
  text "Proj:" at 184.891,-26.554 h1.06
  text "Size:" at 141.706,-26.681 h1.06
  text "'.ProjAuth'" at 163.288,-26.907 h1.06
  text "'.ProjName'" at 189.958,-26.907 h1.06
  text "Date:" at 141.706,-30.265 h0.93
  text "'.ModifiedDate'" at 148.066,-30.265 h0.93
  text "'.ModifiedTime'" at 172.446,-30.265 h0.93
  text "'.Print_Scale'" at 184.891,-30.265 h0.93
  text "www.uvmaero.org" at 227.433,-30.265 h0.93
  text "File:" at 141.706,-32.809 h0.93
  text "'.Pcb_File_Name'" at 148.066,-32.809 h0.93
  text "1" at 11.938,-36.71 h1.23
  text "2" at 81.602,-36.71 h1.23
  text "3" at 151.543,-36.71 h1.23
  text "4" at 221.271,-36.71 h1.23

## Dimensions
0,16.891 to 16.662,26.415 on Top Overlay
97.46,2.54 to 108.959,-4.033 on Bottom Component Outline
97.46,100 to 97.46,0 on Bottom Component Outline
0,97.46 to 100,97.46 on Bottom Component Outline

## Text inside footprints (layer, text, board x,y; h text height)
F1: Top Overlay "f" at 15.291,22.835 h2.29
F3: Top Overlay "f" at 15.291,73.381 h2.29
F4: Top Overlay "f" at 15.291,48.108 h2.29
F5: Top Overlay "f" at 15.291,35.471 h2.29
F6: Top Overlay "f" at 15.291,60.744 h2.29
MTG1: Top Component Outline "HISTORY: SS 091913, CREATED PER SPACEX BASIC F/P AND SYMBOL CREATION STANDARDS." at 4.039,99.009 h0.03; Top Component Outline "LOCATION: TOOL-TEST-MTG.PCBLIB" at 4.572,99.06 h0.03
MTG2: Top Component Outline "HISTORY: SS 091913, CREATED PER SPACEX BASIC F/P AND SYMBOL CREATION STANDARDS." at 94.082,99.009 h0.03; Top Component Outline "LOCATION: TOOL-TEST-MTG.PCBLIB" at 94.615,99.06 h0.03
MTG3: Top Component Outline "LOCATION: TOOL-TEST-MTG.PCBLIB" at 4.572,9.779 h0.03; Top Component Outline "HISTORY: SS 091913, CREATED PER SPACEX BASIC F/P AND SYMBOL CREATION STANDARDS." at 4.039,9.728 h0.03
MTG4: Top Component Outline "HISTORY: SS 091913, CREATED PER SPACEX BASIC F/P AND SYMBOL CREATION STANDARDS." at 94.082,9.728 h0.03; Top Component Outline "LOCATION: TOOL-TEST-MTG.PCBLIB" at 94.615,9.779 h0.03
R1: Top Assembly "Standoff height: 4mm" at 26.605,92.024 h1.02
R2: Top Assembly "Standoff height: 4mm" at 91.77,73.471 h1.02 r270
R3: Top Assembly "Standoff height: 4mm" at 65.467,2.362 h1.02